# Altium PCB QFN16-30-46-A.PcbDoc
Units mil, origin at the board's own origin, x right, y up, seen from the top; angles counter-clockwise.
Board outline 1700 x 1850 mil, 4 copper layers (Top Layer, Metal 2, Metal 3, Bottom Layer), stack 61.6 mil thick; 33 components, 16 nets, 90 pads, 460 vias.
Unrouted connection lines stored in the file: 2.
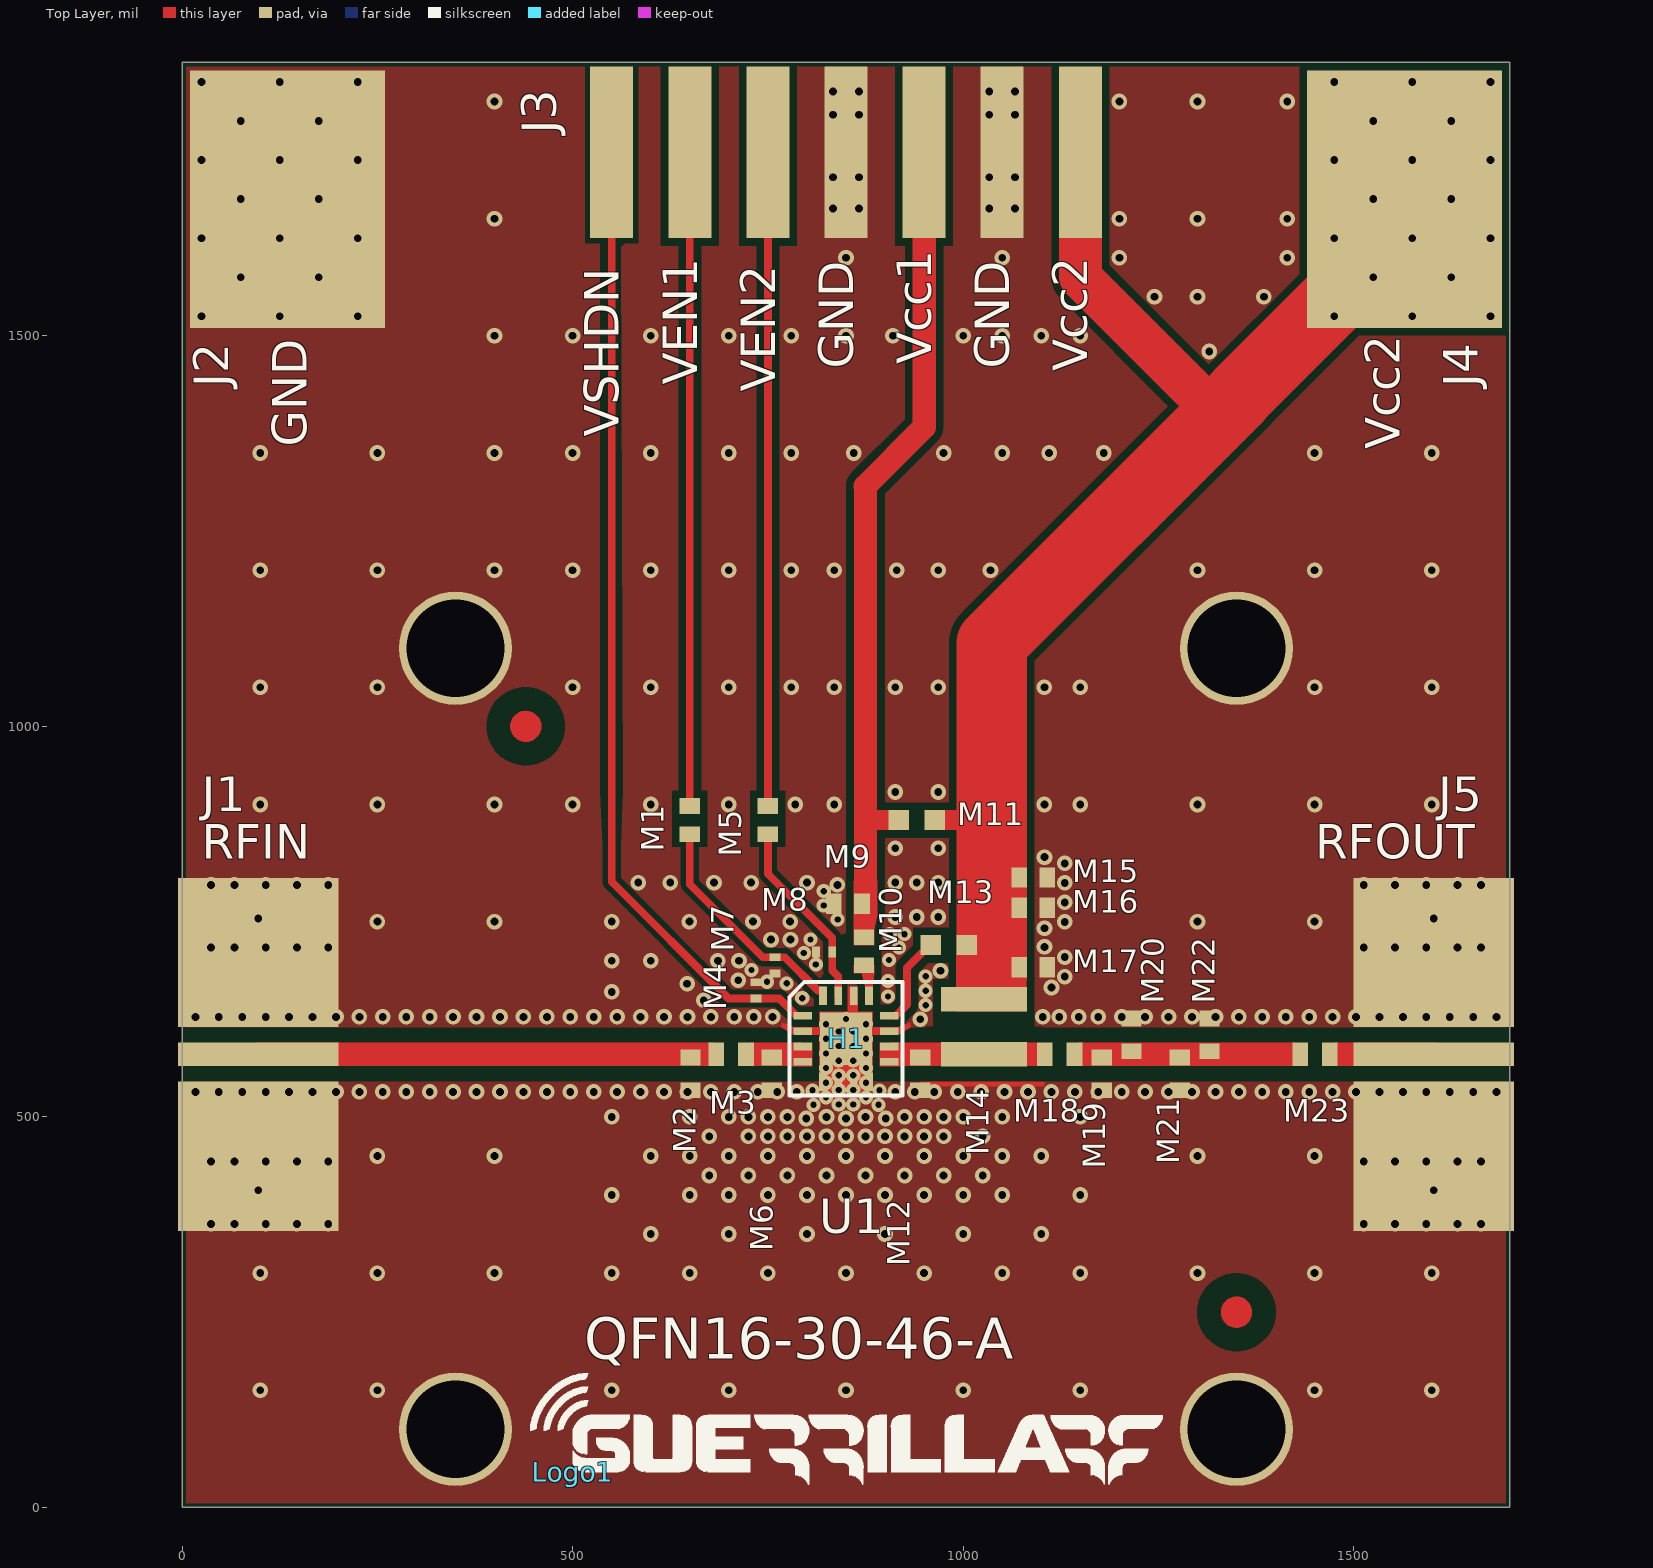
[diagram p0: Top Layer view]
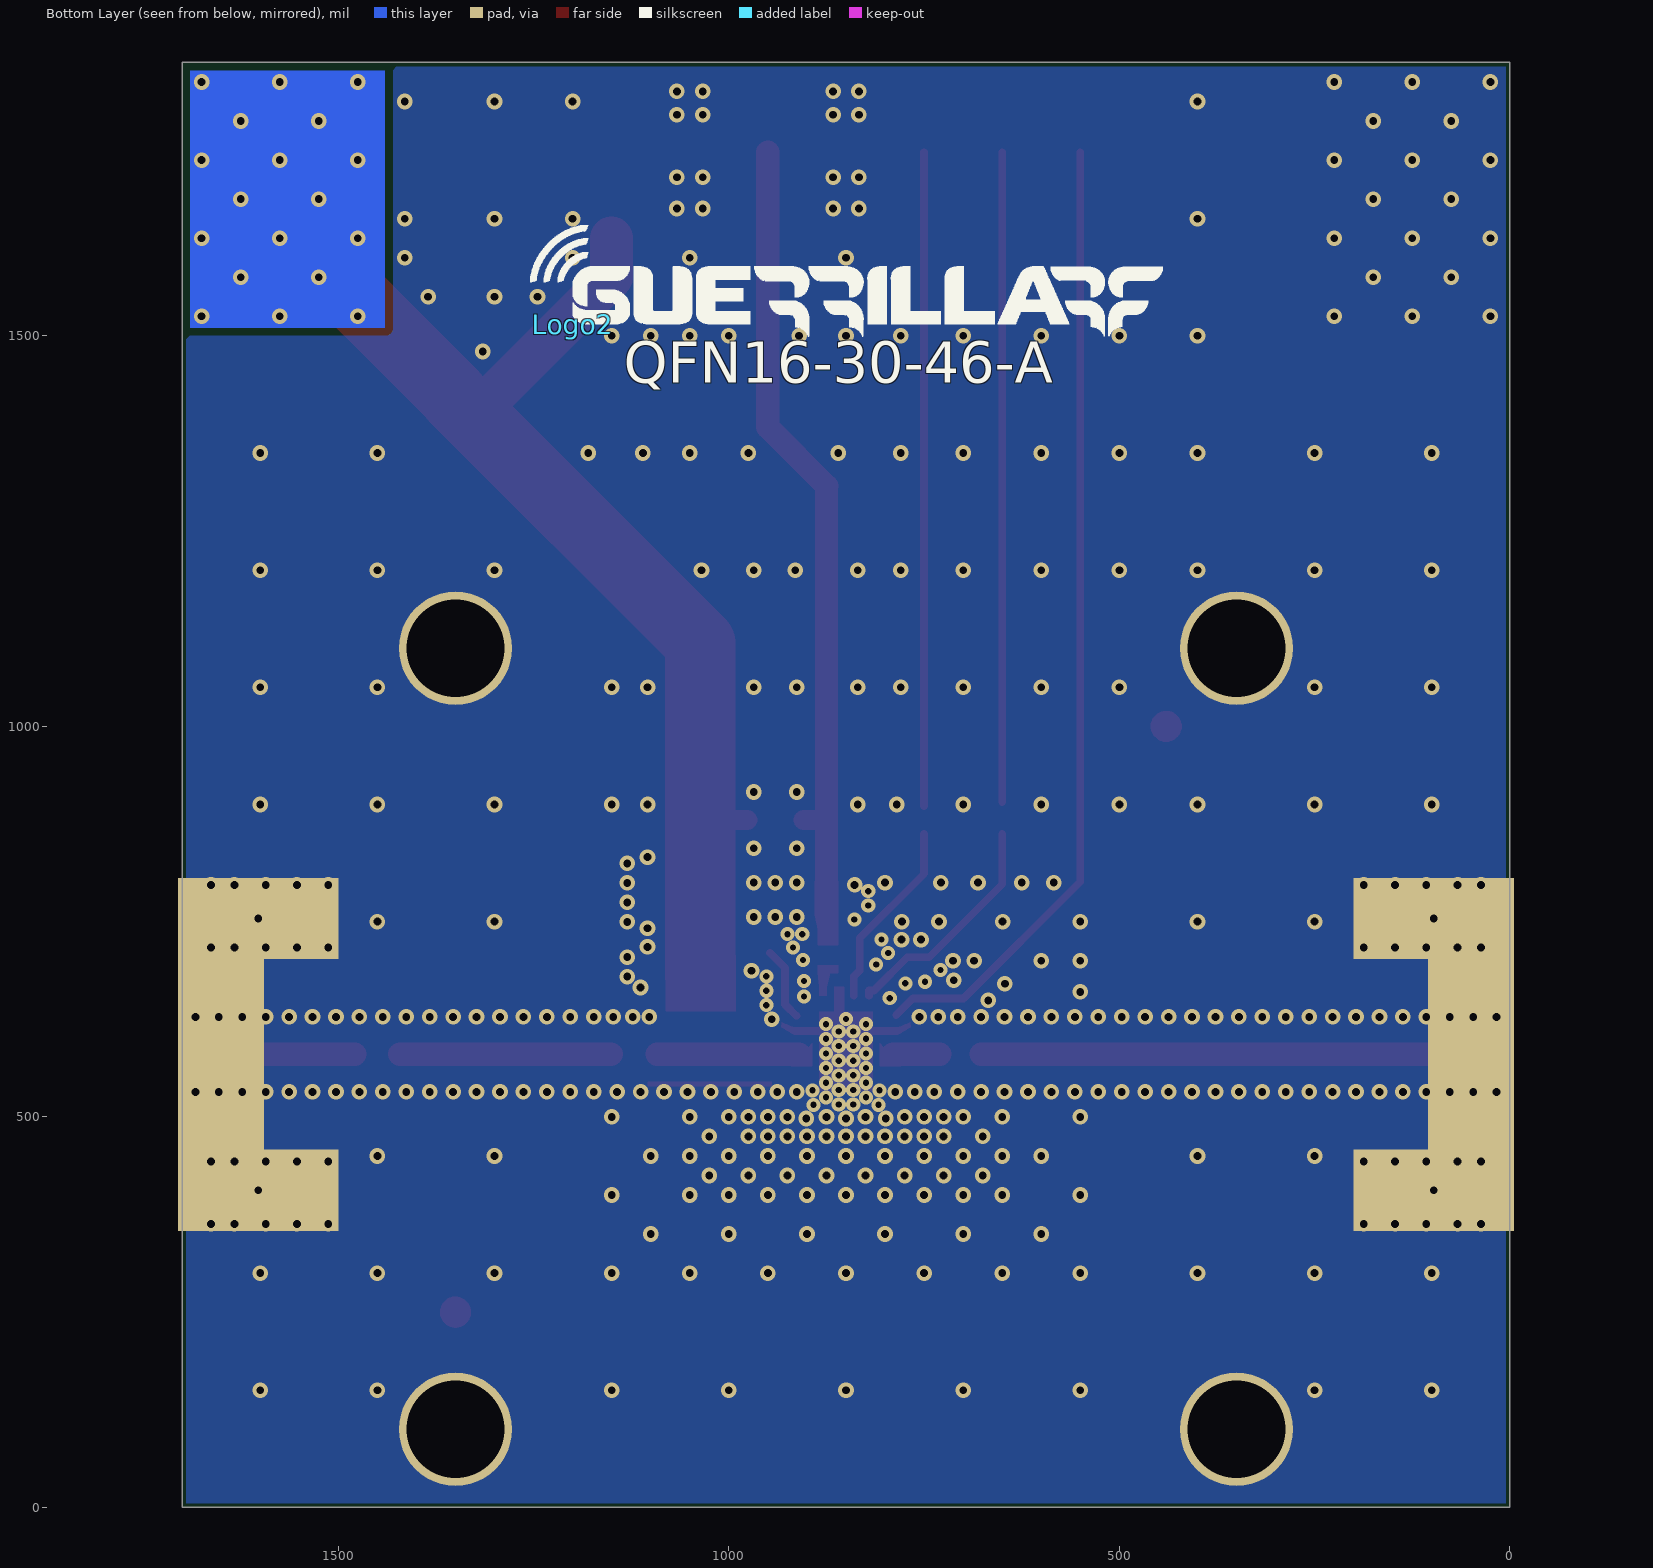
[diagram p1: Bottom Layer view, seen from below]
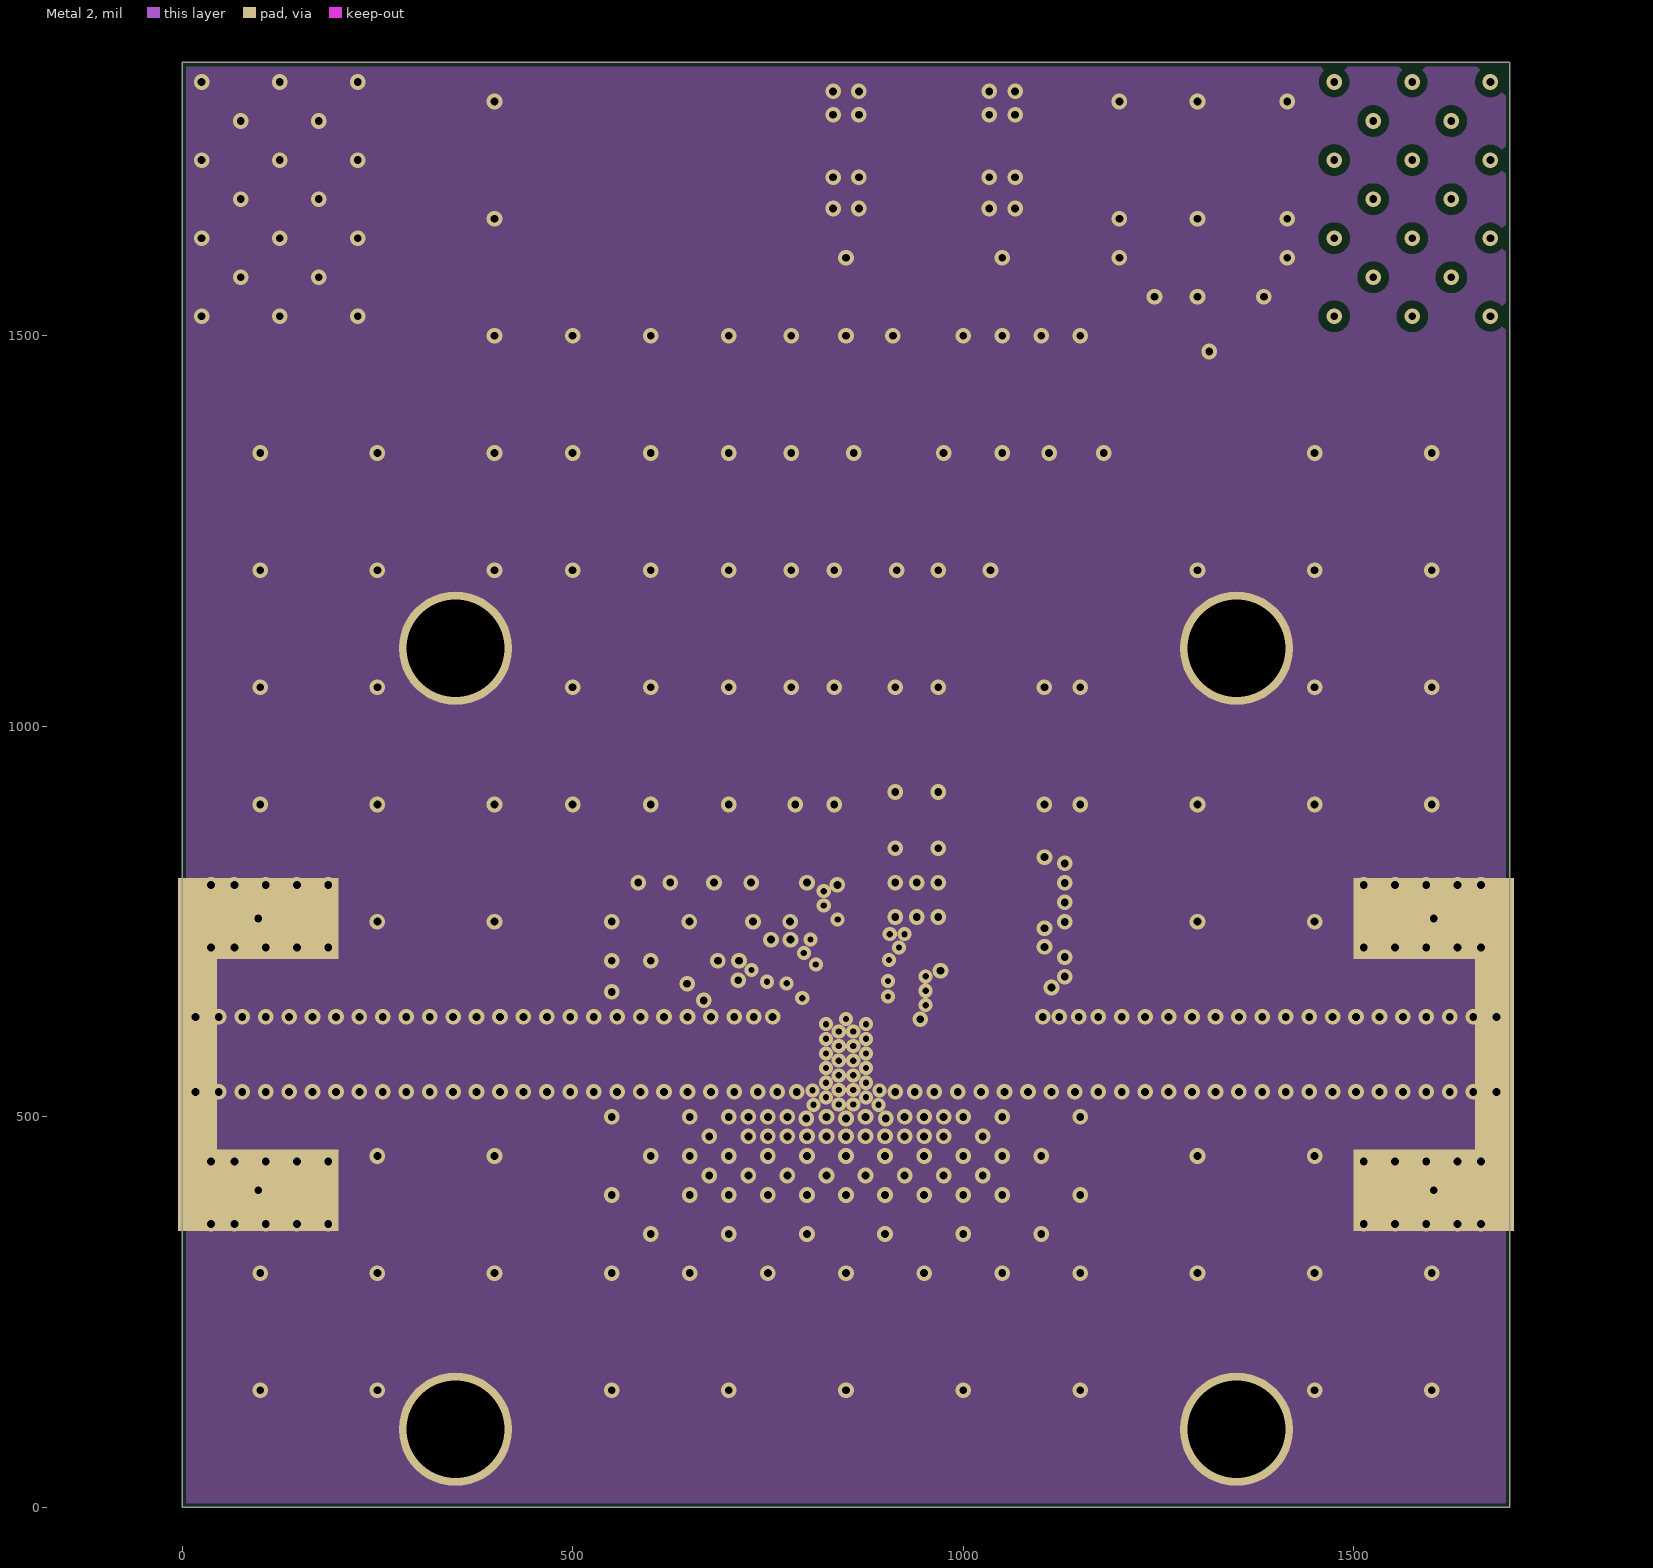
[diagram p2: Metal 2]
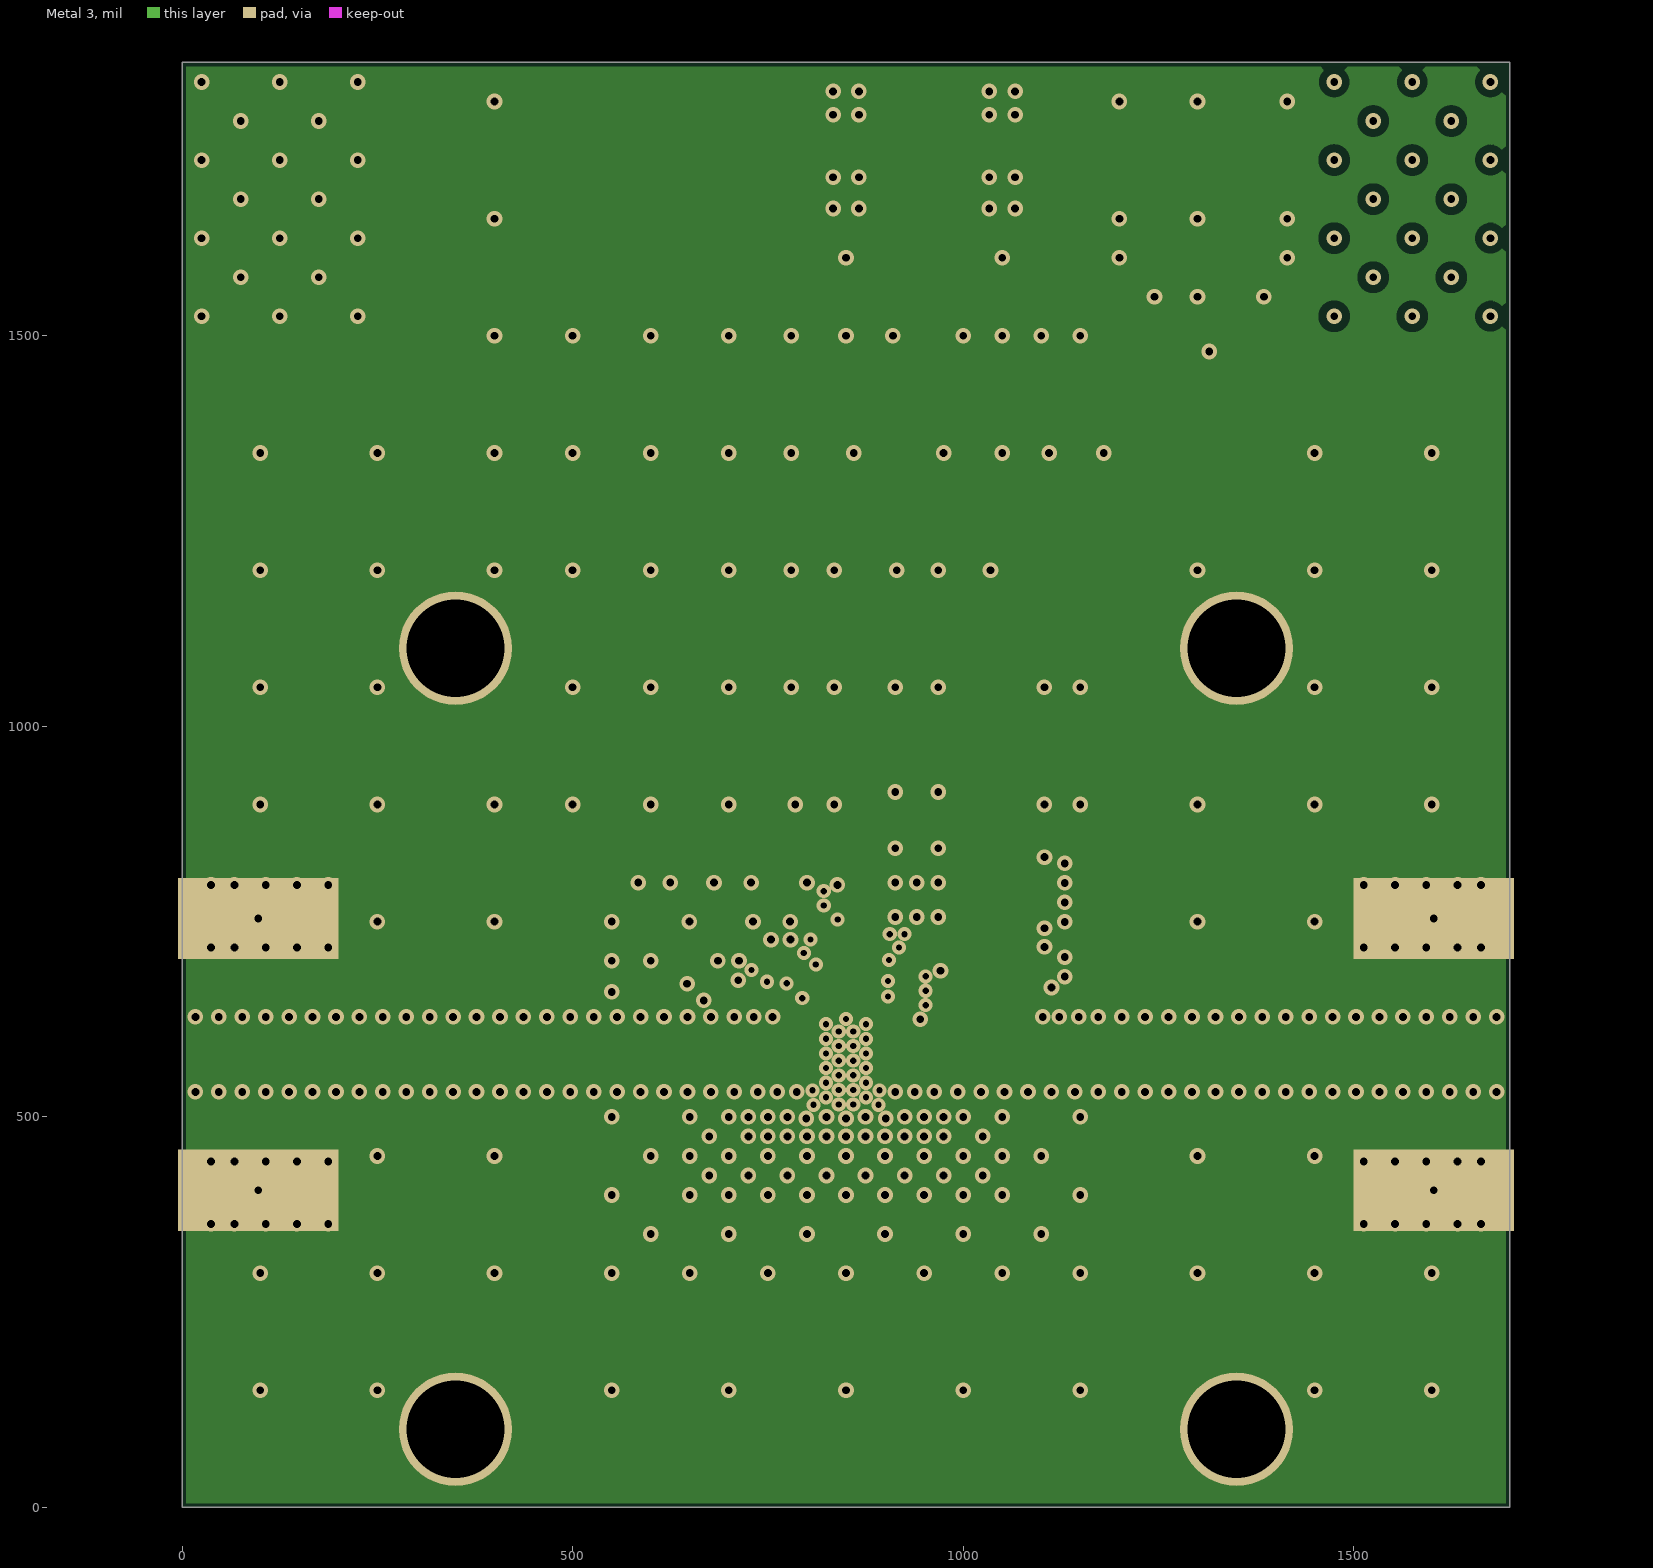
[diagram p3: Metal 3]

## Layer stack, top to bottom
Top Solder: solder mask 0.4, Solder Resist, Dk 3.5
Top Layer: signal copper 1.4
Dielectric 2: core 16, RO4003C, Dk 3.38
Metal 2: signal copper 1.4
Dielectric 1: prepreg 24, FR-4, Dk 4.8
Metal 3: signal copper 1.4
Dielectric 3: core 16, RO4003C, Dk 3.38
Bottom Layer: signal copper 1.4
Bottom Solder: solder mask 0.4, Solder Resist, Dk 3.5

## Board outline
0,0 0,1850 1700,1850 1700,0

## Design rules (kind name [scope] priority, off if disabled: settings)
BackDrilling [IsVia and not InNet('GND')] p1: maxstublength=5 usetopbackdrill=TRUE usebottombackdrill=TRUE holeoversize=10 holetolplus=0.2 holetolminus=0.2
BoardOutlineClearance [All] p1: gap=5 ignorepadtopadclearanceinfootprint=FALSE
Clearance Clearance_I/O [InNetClass('I/O') vs InNet('GND')] p1: gap=7 ignorepadtopadclearanceinfootprint=TRUE
Clearance Clearance_RF_Strip [InNetClass('RF_Strip') vs InNet('GND')] p2: gap=40 ignorepadtopadclearanceinfootprint=TRUE
Clearance Clearance_RF_15-15-8 [InNetClass('RF_15-15-8') vs InNet('GND')] p3: gap=15 ignorepadtopadclearanceinfootprint=TRUE
Clearance Clearance_RF_20-10-12 [InNetClass('RF_20-10-12') vs InNet('GND')] p4: gap=10 ignorepadtopadclearanceinfootprint=TRUE
Clearance Clearance_RF_30-20-16 [InNetClass('RF_30-20-16') vs InNet('GND')] p5: gap=20 ignorepadtopadclearanceinfootprint=TRUE
Clearance Clearance_RF_28-21-16_FR4 [InNetClass('RF_28-21-16_FR4') vs InNet('GND')] p6: gap=21 ignorepadtopadclearanceinfootprint=TRUE
Clearance Clearance_RF_15-27p5-8 [InNetClass('RF_15-27p5-8') vs InNet('GND')] p7: gap=27.5 ignorepadtopadclearanceinfootprint=TRUE
Clearance Clearance_RF_25-22-40_75ohm [InNetClass('RF_25-22-40_75ohm') vs InNet('GND')] p8: gap=22 ignorepadtopadclearanceinfootprint=TRUE
Clearance Clearance_GND [InNet('GND')] p9: gap=10 ignorepadtopadclearanceinfootprint=TRUE
Clearance [All] p10: gap=6 ignorepadtopadclearanceinfootprint=TRUE
ComponentClearance ComponentClearance_Heatsink [InComponent('All') And OnLayer('Top Layer') vs HasFootprint('Heatsink_wFid')] p1: gap=0 collisioncheckmode=3 verticalgap=0 showdistances=FALSE
ComponentClearance ComponentClearance_PCB_Frame [InComponent('All') And OnLayer('Top Layer') vs HasFootprint('PCB_Frame')] p2: gap=0 collisioncheckmode=3 verticalgap=0 showdistances=FALSE
ComponentClearance [All] p3: gap=10 collisioncheckmode=3 verticalgap=10 showdistances=TRUE
HoleSize [All] p1: absolutevalues=TRUE maxlimit=200 minlimit=8 maxpercent=80.000 minpercent=20.000
MinimumSolderMaskSliver [All] p1: minsoldermaskwidth=5
PlaneClearance [Not InNet('GND')] p1: clearance=20
PlaneConnect [InNet('GND')] p1: planeconnectstyle=Direct reliefexpansion=20 reliefentries=4 reliefconductorwidth=10 reliefairgap=10
PolygonConnect [All vs InNet('GND')] p1: connectstyle=Direct reliefconductorwidth=10 reliefentries=4 polygonreliefangle="90 Angle" airgapwidth=10
RoutingVias [All] p1: holewidth=10 width=20 viastyle="Through Hole" minholewidth=8 minwidth=18 maxholewidth=23.62 maxwidth=33.62
SilkToSilkClearance [All] p1: silktosilkclearance=5
SilkToSolderMaskClearance [IsPad] p1: minsilkscreentomaskgap=5 clearancetoexposedcopper=TRUE
SolderMaskExpansion [All] p1: expansion=1 istentingtop=FALSE
UnRoutedNet [All] p1: checkbadconnections=TRUE
Width [All] p1: maxlimit=100 minlimit=6 preferedwidth=10
22 further rules are at their usual default settings.

## Classes and differential pairs
net class RF_30-20-16: NetJ1_1 NetJ3_1 NetJ4_1 NetM1_1 NetM3_1 NetM12_2 NetM18_1
net class I/O: NetJ2_1 NetM1_1 NetM5_1
component class QFN16-30-46-A: H1 J1 J4 J5 Logo1 Logo2 M1 M2 M3 M4 M5 M6 M7 M8 M9 M10 M11 M12 M13 M14 M15 M16 M17 M18 M19 M20 M21 M22 M23 U1

## Components (designator, comment, footprint, x,y, rotation, side; value= is the part's Value field where it differs from the comment)
Designator89 "Comment" PCB_Fab_30T-20G-16D 250,-650 r0 top locked
H1 "Heatsink_wFid" Heatsink_wFid 850,600 r0 top locked
J1 "SMA Round_Pin_RevD + HiFreq" "SMA Round_Pin_RevD + HiFreq" 0,580 r0 top
J2 "Banana_Jack" Banana_Jack 135,1845 r0 top (schematic designator J88)
J3 "Header_7-Pin_100mil" Header_7-Pin_100mil 850,1850 r0 top (schematic designator J2)
J4 "Banana_Jack" Banana_Jack 1565,1845 r0 top (schematic designator J99)
J5 "SMA Round_Pin_RevD + HiFreq" "SMA Round_Pin_RevD + HiFreq" 1700,580 r180 top (schematic designator J3)
Logo1 "Component_1" GRF_2021_Full 500,45 r0 top
Logo2 "Component_1" GRF_2021_Full 1200,1515 r180 bottom
M1 "0402_20x26x16" 0402_20x26x16 650,880 r90 top
M2 "0402_20x26x22" 0402_20x26x22 651,555 r90 top
M3 "0402_20x30x18" 0402_20x30x18 703,580 r180 top
M4 "0201_10x14x11" 0201_10x14x11 735,662 r270 top
M5 "0402_20x26x16" 0402_20x26x16 750,880 r90 top
M6 "0402_20x26x22" 0402_20x26x22 755,555 r90 top
M7 "0201_10x14x11" 0201_10x14x11 759,694 r90 top
M8 "0201_10x14x11" 0201_10x14x11 822,711 r0 top
M9 "0402_20x26x16" 0402_20x26x16 852.5,773 r0 top
M10 "0402_20x26x16" 0402_20x26x16 873,712 r90 top
M11 "0402_26x26x20" 0402_26x26x20 940.5,880 r180 top
M12 "0402_20x26x22" 0402_20x26x22 945,555 r90 top
M13 "0402_26x26x20" 0402_26x26x20 981.5,720 r0 top
M14 "Coilcraft_Sq_Air_Core" Coilcraft_Sq_Air_Core 1026.5,615.43 r90 top
M15 "0402_20x26x16" 0402_20x26x16 1089.62,806.61 r180 top
M16 "0402_20x26x16" 0402_20x26x16 1089.62,767.61 r180 top
M17 "0402_20x26x16" 0402_20x26x16 1089.62,691.61 r180 top
M18 "0402_20x30x18" 0402_20x30x18 1123.5,580 r180 top
M19 "0402_20x26x22" 0402_20x26x22 1177.5,555 r90 top
M20 "0402_20x26x22" 0402_20x26x22 1215.5,605 r270 top
M21 "0402_20x26x22" 0402_20x26x22 1277.5,555 r90 top
M22 "0402_20x26x22" 0402_20x26x22 1315.5,605 r270 top
M23 "0402_20x30x18" 0402_20x30x18 1450.5,580 r180 top
U1 "QFN16_3x3mm_RevG" QFN16_3x3mm_RevG 850,600 r0 top

## Footprints (in the part's own frame and the unit in brackets; to place one, negate y for a bottom-side part, rotate by r counter-clockwise, add the part's x,y. Pads: shape width x height; smd on the part's side, far side on the other; paste and mask are expansions set on the pad)
0201_10x14x11 [mil] "Generic 0201 SMD"
  rect 10x14 smd: 1(-10.5,0) 2(10.5,0)
0402_20x26x16 [mil] "0402 26mil Wide (Smaller Generic)"
  rect 20x26 smd: 1(-18,0) 2(18,0)
0402_20x26x22 [mil] "0402 RF Shunt 30mil RF"
  rect 20x26 smd: 1(-21,0) 2(21,0)
0402_20x30x18 [mil] "0402 RF Series 30mil RF"
  rect 20x30 smd: 1(-19,0) 2(19,0)
0402_26x26x20 [mil] "0402 RL"
  rect 26x26 smd: 1(-23,0) 2(23,0)
Banana_Jack [mil] "Female Connector"
  rect 250x330 smd paste-125: 1(0,-170)
Coilcraft_Sq_Air_Core [mm] "Generic for some 0807SQ-0908SQ"
  rect 0.8x2.8 smd: 1(-0.9,0) 2(0.9,0)
GRF_2021_Full [mil]
  silkscreen extent -54,-16 756,127
Header_7-Pin_100mil [mil] "Generic Flat Header"
  rect 55x220 smd paste-28: 1(-300,-115) 2(-200,-115) 3(-100,-115) 4(0,-115) 5(100,-115) 6(200,-115) 7(300,-115)
Heatsink_wFid [mil] "Heatsink mounting wFiducials"
  round 145 hole 125 paste-100 mask+12: 1(-500,-500) 1(-500,500) 1(500,-500) 1(500,500)
  Top Layer circle w20: c-410,400 r10
  Top Layer circle w20: c500,-350 r10
  Top Layer pour cut-out: 500,-400 480.87,-396.19 464.64,-385.36 453.81,-369.13 450,-350 450,-350 453.81,-330.87 464.64,-314.64 480.87,-303.81 500,-300 500,-300 519.13,-303.81 535.36,-314.64 546.19,-330.87 550,-350 550,-350 546.19,-369.13 535.36,-385.36 519.13,-396.19 500,-400
  Top Layer pour cut-out: -460,400 -456.19,419.13 -445.36,435.36 -429.13,446.19 -410,450 -410,450 -390.87,446.19 -374.64,435.36 -363.81,419.13 -360,400 -360,400 -363.81,380.87 -374.64,364.64 -390.87,353.81 -410,350 -410,350 -429.13,353.81 -445.36,364.64 -456.19,380.87 -460,400
PCB_Fab_30T-20G-16D [mil] "STD RF&Stack  30mil RF 20mil Gap  16mil Dielectric"
QFN16_3x3mm_RevG [mm] "Standard Footprint (Amkor-J / Unisem)"
  rect 0.6x0.25 smd paste-100: 1(-1.4,0.75) 2(-1.4,0.25) 3(-1.4,-0.25) 4(-1.4,-0.75) 9(1.4,-0.75) 10(1.4,-0.25) 11(1.4,0.25) 12(1.4,0.75)
  rect 0.25x0.6 smd paste-100: 5(-0.75,-1.4) 6(-0.25,-1.4) 7(0.25,-1.4) 8(0.75,-1.4) 13(0.75,1.4) 14(0.25,1.4) 15(-0.25,1.4) 16(-0.75,1.4)
  rect 1.7x1.7 smd paste-100: 17(0,0)
  silkscreen extent -1.84,-1.84 1.84,1.84
"SMA Round_Pin_RevD + HiFreq" [mil] "142-0701-801 / 142-0761-861"
  rect 205x30 smd paste-30: 1(97.5,0)
  rect 50x290 on Mid1 paste-50: 2(20,0)
  rect 110x280 smd far side paste-100: 2(50,0)
  rect 205x104 hole 10 paste-100: 2(97.5,-174) 2(97.5,174)
  rect 205x100 smd paste-100: 2(97.5,-85) 2(97.5,85)

## Part data
H1: library part Heatsink
J1 J5: library part RF_Conn
J2 J4: library part "Banana _Jack", "Banana Jack, Female"
J3: library part Header_7-Pin, "Header 7-Pin"
M1 M5 M11 M13: library part Resistor
M2 M3 M4 M6 M7 M8 M9 M12 M15 M16 M17 M18 M19 M20 M21 M22 M23: library part Capacitor
M10 M14: library part Inductor
U1: library part QFN16_3x3mm, "QFN16_3x3mm"

## Via types
v1: diameter 20/20/20/20 (per signal layer), hole 10, Top Layer to Bottom Layer, tented both sides, 352 vias
v2: diameter 18/18/18/18 (per signal layer), hole 8, Top Layer to Bottom Layer, tented both sides, 48 vias
v3: diameter 20, hole 10, Top Layer to Bottom Layer, 40 vias
v4: diameter 20/20/20/20 (per signal layer), hole 10, Top Layer to Bottom Layer, 16 vias
v5: diameter 20/20/20/20 (per signal layer), hole 10, Top Layer to Bottom Layer, tented bottom, 4 vias

## Nets (pads, with @x,y where several pads share a name; then routed paths per layer and width w, separated by ;. In a path a pad name is that pad's centre, name@x,y a point inside that pad or via, vN(x,y) a via of type N, cw(c..) or ccw(c..) an arc to the next point about the centre after c; other vN are vias at no path point)
GND: H1.1 J1.2 J2.1 J3.4 J3.6 J5.2 M2.1 M4.1 M6.1 M7.1 M8.1 M9.1 M12.1 M15.1 M16.1 M17.1 M19.1 M20.1 M21.1 M22.1 U1.2 U1.5 U1.6 U1.7 U1.8 U1.11 U1.14 U1.17
  other v1: 100,150 250,150 550,150 700,150 850,150 1000,150 1150,150 1450,150 1600,150 100,300 250,300 400,300 550,300 650,300 750,300 850,300 950,300 1050,300 1150,300 1300,300 1450,300 1600,300 600,350 700,350 800,350 900,350 1000,350 1100,350 550,400 650,400 700,400 750,400 800,400 850,400 900,400 950,400 1000,400 1050,400 1150,400 675,425 725,425 775,425 825,425 875,425 925,425 975,425 1025,425 250,450 400,450 600,450 650,450 700,450 750,450 800,450 850,450 900,450 950,450 1000,450 1050,450 1100,450 1300,450 1450,450 675,475 725,475 750,475 775,475 800,475 825,475 850,475 875,475 900,475 925,475 950,475 975,475 1025,475 799,498 850,498 901,498 550,500 650,500 700,500 725,500 750,500 775,500 825,500 875,500 925,500 950,500 975,500 1000,500 1050,500 1150,500 17,532 47,532 77,532 137,532 167,532 197,532 227,532 257,532 287,532 317,532 347,532 377,532 407,532 437,532 467,532 497,532 527,532 557,532 587,532 617,532 647,532 677,532 707,532 737,532 762,532 787,532 913,532 938,532 963,532 993,532 1023,532 1053,532 1083,532 1113,532 1143,532 1173,532 1203,532 1233,532 1263,532 1293,532 1323,532 1353,532 1383,532 1413,532 1443,532 1473,532 1503,532 1533,532 1563,532 1623,532 1653,532 1683,532 945,625 17,628 47,628 77,628 137,628 167,628 197,628 227,628 257,628 287,628 317,628 347,628 377,628 407,628 437,628 467,628 497,628 527,628 557,628 587,628 617,628 647,628 677,628 707,628 732,628 756,628 1102,628 1123,628 1148,628 1173,628 1203,628 1233,628 1263,628 1293,628 1323,628 1353,628 1383,628 1413,628 1443,628 1473,628 1503,628 1533,628 1563,628 1623,628 1653,628 1683,628 667.79,649.21 550,660 1113.12,665.61 646.57,670.43 712,675 1130.12,679.61 971,687 550,700 600,700 686,700 713,700 1130.12,704.61 1104.12,717.61 754,727 779,727 1104.12,741.61 250,750 400,750 550,750 649.55,750 731,750 778.5,750 1130.12,749.61 1300,750 1450,750 913,756 940.5,756 968,756 1130.12,774.61 839,797 584.09,800 625,800 681,800 728.5,800 800,800 913,800 940.5,800 968,800 1130.12,799.61 1130.12,824.61 1104.12,832.61 913,844 968,844 100,900 250,900 400,900 500,900 600,900 700,900 785,900 835,900 1104,900 1150,900 1300,900 1450,900 1600,900 913,916 968,916 100,1050 250,1050 500,1050 600,1050 700,1050 780,1050 835,1050 913,1050 968,1050 1104,1050 1150,1050 1450,1050 1600,1050 100,1200 250,1200 400,1200 500,1200 600,1200 700,1200 780,1200 835,1200 915,1200 968,1200 1035,1200 1300,1200 1450,1200 1600,1200 100,1350 250,1350 400,1350 500,1350 600,1350 700,1350 780,1350 860,1350 975,1350 1050,1350 1110,1350 1180,1350 1450,1350 1600,1350 1315,1480 400,1500 500,1500 600,1500 700,1500 780,1500 850,1500 910,1500 1000,1500 1050,1500 1100,1500 1150,1500 25,1525 125,1525 225,1525 1245,1550 1300,1550 1385,1550 75,1575 175,1575 850,1600 1050,1600 1200,1600 1415,1600 25,1625 125,1625 225,1625 400,1650 1200,1650 1300,1650 1415,1650 75,1675 175,1675 25,1725 125,1725 225,1725 75,1775 175,1775 400,1800 1200,1800 1300,1800 1415,1800 25,1825 125,1825 225,1825
  other v2: 808.25,515.5 840.75,515.75 859.25,515.75 891.75,515.5 824.5,525 875.5,525 807,534 893,534 840.75,534.5 859.25,534.5 824.5,543.75 875.5,543.75 840.75,553.25 859.25,553.25 824.5,562.5 875.5,562.5 840.75,572 859.25,572 824.5,581.25 875.5,581.25 840.75,590.75 859.25,590.75 824.5,600 875.5,600 840.75,609.25 859.25,609.25 824.5,618.75 875.5,618.75 850,625.5 952,643 794,652 903.75,654 952,661.5 774,671 749,673 903.75,674 952,680 729,688 811.31,695.17 905,701 796,710 918,717 804.5,727 906,734 925,734 839.29,752.6 821.5,770.5 821.5,789
  other v3: 37,363 67,363 107,363 147,363 187,363 1513,363 1553,363 1593,363 1633,363 1663,363 37,443 67,443 107,443 147,443 187,443 1513,443 1553,443 1593,443 1633,443 1663,443 37,717 67,717 107,717 147,717 187,717 1513,717 1553,717 1593,717 1633,717 1663,717 37,797 67,797 107,797 147,797 187,797 1513,797 1553,797 1593,797 1633,797 1663,797
  other v4: 833.5,1663 866.5,1663 1033.5,1663 1066.5,1663 833.5,1703 866.5,1703 1033.5,1703 1066.5,1703 833.5,1783 866.5,1783 1033.5,1783 1066.5,1783 833.5,1813 866.5,1813 1033.5,1813 1066.5,1813
  other v5: 107,532 1593,532 107,628 1593,628
NetJ1_1: J1.1 M2.2 M3.2 | length 579.5
  Top Layer w30: J1.1 M3.2@677,580
NetJ2_1: J3.1 M4.2 U1.1 | length 1240.1
  Top Layer w10: J3.1 550,862 550,801.09 699.59,651.5 M4.2 764.58,651.5 U1.1@785.56,630.53
NetJ2_2: J3.2 M1.2 | length 832
  Top Layer w10: M1.2@650,903 J3.2
NetJ2_3: J3.3 M5.2 | length 837
  Top Layer w10: M5.2 J3.3
NetJ2_5: J3.5 M9.2 M10.2 M11.2 | length 992.9
  Top Layer w26: 875.88,880 M11.2@904.5,880
  Top Layer w30: 874.5,1307.5 950,1383 J3.5 ; 875,802 875,1307.5
NetJ2_7: J3.7 J4.1 M11.1 M13.2 M14.2 M15.2 M16.2 M17.2 | length 1457.3
  Top Layer w26: 976.5,880 1036.5,880
  Top Layer w55: J3.7@1150,1625 1150,1575 1323.65,1401.35
  Top Layer w90: 1036.5,680.12 1036.5,767.61 1036.5,1105.12 ; 1036.5,1106.5 1352.5,1422.5 ; 1352.09,1422.91 J4.1@1514.63,1585.46
  other v1: 1475,1525 1575,1525 1675,1525 1525,1575 1625,1575 1475,1625 1575,1625 1675,1625 1525,1675 1625,1675 1475,1725 1575,1725 1675,1725 1525,1775 1625,1775 1475,1825 1575,1825 1675,1825
NetJ3_1: J5.1 M23.1 | length 123.5
  Top Layer w30: M23.1@1479,580 J5.1
NetJ4_1: 
NetM1_1: M1.1 M7.2 U1.16 | length 297.6
  Top Layer w10: M1.1 650,798 743.5,704.5 M7.2 771.68,704.5 814.25,661.93 820.39,661.93 820.47,661.85 U1.16
NetM3_1: M3.1 M6.2 U1.3 U1.4 | length 60
  Top Layer w30: M3.1@730,580 750,580 790,580
NetM5_1: M5.1 M8.2 U1.15 | length 244.2
  Top Layer w10: M5.1 750,811.5 832.5,729 M8.2 832.5,687.5 840.16,679.84 U1.15
NetM10_1: M10.1 U1.13
NetM12_2: M12.2 M14.1 M18.2 U1.9 U1.10 | length 182
  Top Layer w30: 910,580 990,580 1025,580 1092,580
NetM13_1: M13.1 U1.12 | length 94.7
  Top Layer w10: U1.12@913.53,629.53 928,644 928,690.84 M13.1@947.36,710.19
NetM18_1: M18.1 M19.2 M20.2 M21.2 M22.2 M23.2 | length 271
  Top Layer w30: M18.1@1150.5,580 1177.5,580 1215.5,580 M23.2@1421.5,580

## Polygon pours and split planes (outlines as drawn)
GND on Bottom Layer "GND_L04_P001" (solid, pour order 1): 0,0 1700,0 1700,1850 0,1850
GND on Metal 2 "NONET_L-01_P-001" (solid, pour order 2): 0,0 1700,0 1700,1850 0,1850
GND on Metal 3 "NONET_L-01_P-001" (solid, pour order 3): 0,0 1700,0 1700,1850 0,1850
GND on Top Layer "GND_L01_P000" (solid, pour order 0): 0,0 1700,0 1700,1850 0,1850

## Other copper
Top Layer:
  rectangle net GND: 1091.12,615 1101.12,615.75
  rectangle net GND: 950.88,615 960.88,615.75
  rectangle net GND: 945,539 1104,545
  rectangle net NetJ2_7: 991,635.12 1081.12,707
  rectangle net GND: 854.92,643.31 854.99,666.93
  pour cut-out: 727,878 727,845 773,845 773,878
  pour cut-out: 627,878 627,845 673,845 673,878
  pour cut-out: 565,918 562,845 538,845 535,918 535,1618 562,1618
  pour cut-out: 961.38,625.12 961.38,615.43 1091.62,615.43 1091.62,625.12
  pour cut-out: 815.55,614.76 806.69,614.76 806.69,634.34 815.55,643.2 815.55,643.31 852,643.31 852,615
  region net NetJ2_5: 860,720 860,802 890,802 890,758 886,740 886,720
  region net NetM10_1: 860,694 860,684 870,684 874.61,666.93 874.61,655.12 884.45,655.12 884.45,666.93 886,684 886,694
  region net GND: 783.07,614.76 768,621 767,615 783.07,604.92
  region net GND: 916.93,614.76 932,621 933,615 916.93,604.92
  region net NetM12_2: 893.31,595.08 893.31,565 920,565
  region net NetM3_1: 806.69,595.08 806.69,565 780,565
  region net GND: 815.55,533.07 815.55,604.92 783.07,604.92 783.07,614.76 815.55,614.76 815.55,634.5 852.16,634.5 852.16,666.93 864.76,666.93 864.76,634.5 884.45,634.5 884.45,614.76 916.93,614.76 916.93,604.92 884.45,604.92 884.45,533.07
Bottom Layer:
  rectangle net NetJ2_7: 1440,1510 1690,1840

## Silkscreen, mask and mechanical layers (free items; w line width, h text height)
Top Overlay:
  text "Vcc1" at 973.73,1463.35 h75 r90
  text "GND" at 874.01,1458.01 h75 r90
  text "GND" at 1074.01,1458.01 h75 r90
  text "Vcc2" at 1173.73,1454.54 h75 r90
  text "VEN1" at 674.12,1437.33 h75 r90
  text "VEN2" at 774.12,1428.51 h75 r90
  text "VSHDN" at 574.01,1370.91 h75 r90
  text "GND" at 174.01,1358.01 h75 r90
  text "Vcc2" at 1573.73,1354.54 h75 r90
  text "RFIN" at 25,815.99 h75
  text "RFOUT" at 1450.56,815.99 h75
  text "QFN16-30-46-A" at 515.16,172.93 h90
Bottom Overlay:
  text "QFN16-30-46-A" at 1134.84,1422.93 h90
Top Solder:
  rectangle: 1163.5,565 1410.5,595
  rectangle: 1163.5,615 1410.5,638
  rectangle: 1163.5,522 1410.5,545
Bottom Solder:
  region: 0,1400 0,821 215,821 215,687 122,687 122,473 215,473 215,339 0,339 0,0 1700,0 1700,339 1485,339 1485,473 1578,473 1578,687 1485,687 1485,821 1700,821 1700,1400
Board_Dimension:
  the board outline again, w10
Drill Drawing:
  lines w15: -1142.5,-3392.5 3932.11,-3392.5 ; -1142.5,-2942.5 3932.11,-2942.5 ; -591.62,-3542.5 -591.62,-2792.5 ; 8.22,-3542.5 8.22,-2792.5 ; 1147.88,-3542.5 1147.88,-2792.5 ; 1653.76,-3542.5 1653.76,-2792.5 ; 2387.56,-3542.5 2387.56,-2792.5 ; -1142.5,-3542.5 3932.11,-3542.5 3932.11,-2792.5 -1142.5,-2792.5 -1142.5,-3542.5
  text "Symbol" at -1052.5,-2897.5 h72
  text "Count" at -546.62,-2897.5 h72
  text "Hole Size" at 53.22,-2897.5 h72
  text "Plated" at 1192.88,-2897.5 h72
  text "Hole Type" at 1698.76,-2897.5 h72
  text "Drill Layer Pair" at 2432.56,-2897.5 h72
  text "48" at -546.62,-3047.5 h60
  text "8.00mil (0.203mm)" at 53.22,-3047.5 h60
  text "PTH" at 1192.88,-3047.5 h60
  text "Round" at 1698.76,-3047.5 h60
  text "Top Layer - Bottom Layer" at 2432.56,-3047.5 h60
  text "A" at -1081.59,-3057.49 h66.67
  text "416" at -546.62,-3197.5 h60
  text "10.00mil (0.254mm)" at 53.22,-3197.5 h60
  text "PTH" at 1192.88,-3197.5 h60
  text "Round" at 1698.76,-3197.5 h60
  text "Top Layer - Bottom Layer" at 2432.56,-3197.5 h60
  text "B" at -1081.59,-3207.49 h66.67
  text "4" at -546.62,-3347.5 h60
  text "125.00mil (3.175mm)" at 53.22,-3347.5 h60
  text "PTH" at 1192.88,-3347.5 h60
  text "Round" at 1698.76,-3347.5 h60
  text "Top Layer - Bottom Layer" at 2432.56,-3347.5 h60
  text "H" at -1081.59,-3357.49 h66.67
  text "468 Total" at -546.62,-3497.5 h60
Document:
  lines w10: -350,1975 -50,737.94 ; -25,350 -50,350 -50,825 -25,825 ; 535.16,580 200,2275 750,580 ; 958,576 1550,2275 1351.23,580 ; 1725,350 1750,350 1750,825 1725,825 ; 1750,750.97 2100,1975

## Dimensions
0,0 to 1700,0 on Mechanical 16
0,0 to 1350,100 on Mechanical 16
0,0 to 350,100 on Mechanical 16
0,1850 to 0,0 on Mechanical 16
0,0 to 350,1100 on Mechanical 16
0,0 to 350,100 on Mechanical 16

## Text inside footprints (layer, text, board x,y; h text height)
Designator89: Drill Drawing "Drill Drawing" at 500,-2528.29 h125; Top Overlay "Top Overlay (Silk Screen)" at 500,-1528.93 h125; Metal 2 "Metal 2" at 500,-1939.57 h125; Bottom Overlay "Bottom Overlay (Silk Screen)" at 500,-2428.93 h125; Document "Specifications:  / All units are in mils unless otherwise specified.  / 1. Materials  /     Beginning foil thickness 1/2oz min. but shall meet the  /     minimum requirements below:  /     Layer 1 - Top Layer, 1 oz copper, 1.4mil /     Dielectric - Rogers 4003, 16mil +/- 1mil  /     Layer 2 - Ground Plane, 1 oz copper, 1.4mil /     Dielectric - Fr4 with 180Tg, (adjust this layer to meet thickness target)  /     Layer 3 - Ground Plane, 1 oz copper, 1.4mil /     Dielectric - Rogers 4003, 16mil +/- 1mil  /     Layer 4 - Bottom Layer, 1 oz copper, 1.4mil  /     Total Board Thickness = 62mil +/- 5mil not including top and bottom solder mask.  / 2. Hole Plating  /     Copper plate in Thru Hole Vias -  1.0mil thick minimum (Approx. 1.5mil on  /     surface).  / 3. Finish  /     ENIG  /       Thickness 3-8 micro inches.  /     Solder Mask  /       Liquid Photo Imagable (LPI) Solder Mask Over Bare Copper (SMOBC) on Both /      Sides of PCB.  /       Color: Red or Approved Equal.  /     Silkscreen: White Non-Conductive Epoxy Ink.  /       Supplier ID and Date Code shall be noted on bottom silkscreen.  / 4. Tolerances  /     Overall board dimension tolerance +/- 5mil.  /     Hole Diameter >= 100mil +/- 5mil before Plating. /     Hole Diameter < 100mil +/- 3mil before Plating. /     Layer to layer registration should be +/- 3mil.  /     All holes shall be located within hole to pad tangency.  / 5. Traces  /     Conductors indicated as Note A shall be 30mil +/- 1mil wide and have a coplanar  /     ground spacing of 20mil +/- 1mil Manufacturer shall test for lines indicated to be  /     50 Ohm +/- 5% and may adjust the width as needed.  /     Minimum conductor width is 6mil +/- 1mil.  /     Minimum conductor to conductor spacing is 6mil.  /     TDR coupon required to be delivered with boards.  /     The controlled impedance on layer 1 shall be 50 Ohms +/- 5%. /  6. RF Connections /     Areas indicated as Note B shall have metal extending to  the board edge and  /     exposed when viewed from the side.  /     This note will apply to all layers in the indicated area.  /     Burrs and potential shorts will be accepted." at 4650,-1646.6 h125; Document "Note B" at 2125,1985.6 h125; Document "Note B" at -675,1985.6 h125; Document "Note A" at -150,2310.6 h125; Document "Note A" at 1550,2310.6 h125; Document "R.Williamson" at 5395,-3604.4 h125; Document "8/29/2023" at 7445,-3625.03 h125; Document "QFN16-30-46-A" at 7375,-3352.6 h125; Document "A" at 8945,-3355.03 h125; Document "Guerrilla RF" at 7345,-3079.04 h200; Top Paste "Top Paste" at 500,-1628.93 h125; Metal 3 "Metal 3" at 500,-2039.51 h125; Top Solder "Top Solder (Mask)" at 500,-1728.93 h125; Bottom Layer "Bottom Layer (Metal)" at 500,-2128.93 h125; Bottom Paste "Bottom Paste" at 500,-2339.4 h125; Bottom Solder "Bottom Solder (Mask)" at 500,-2228.93 h125; Top Layer "Top Layer (Metal)" at 500,-1828.93 h125